# Altium PCB SolarPanel_v2.PcbDoc
Units mm, origin at the board's own origin, x right, y up, seen from the top; angles counter-clockwise.
Board outline 320.5 x 82 mm, 4 copper layers (Top Layer, Power 1, Power 2, Bottom Layer), stack 1.58 mm thick; 7 components, 5 nets, 38 pads, 120 vias.
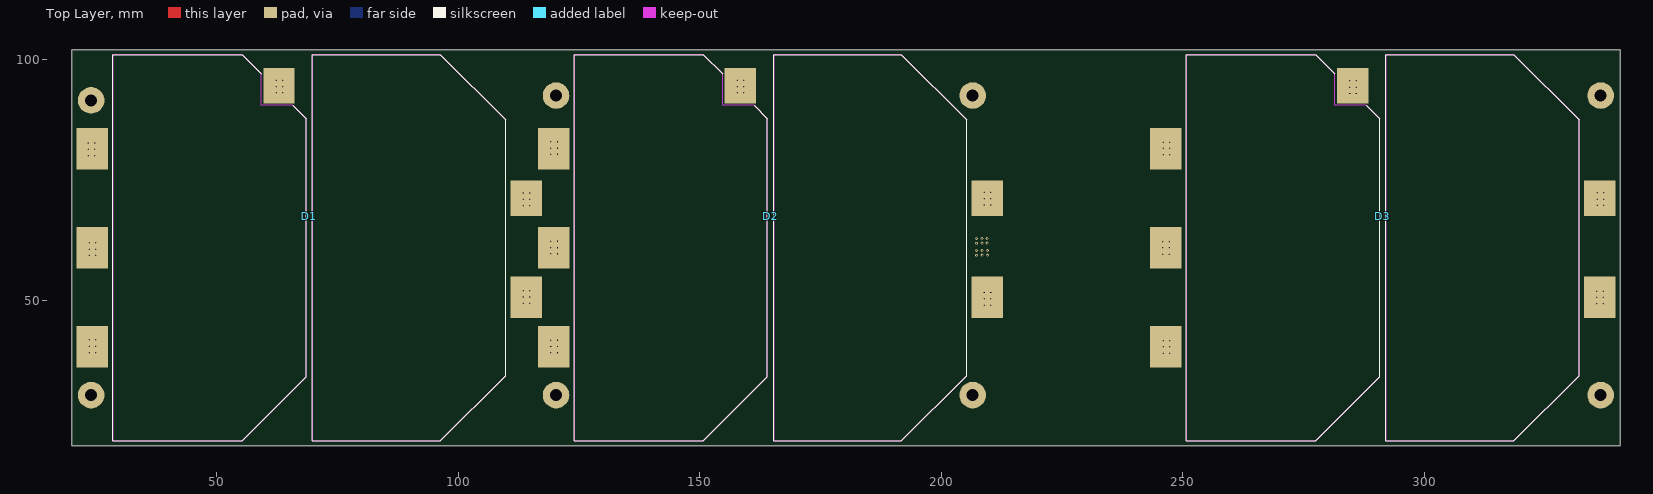
[diagram p0: Top Layer view]
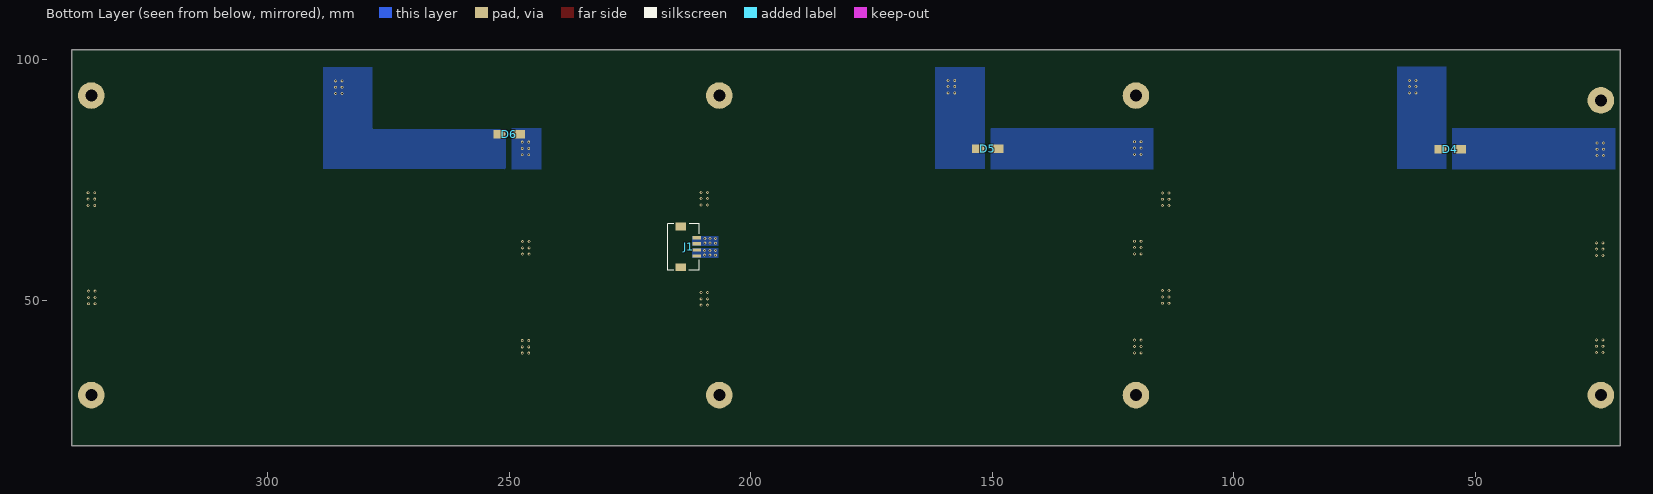
[diagram p1: Bottom Layer view, seen from below]
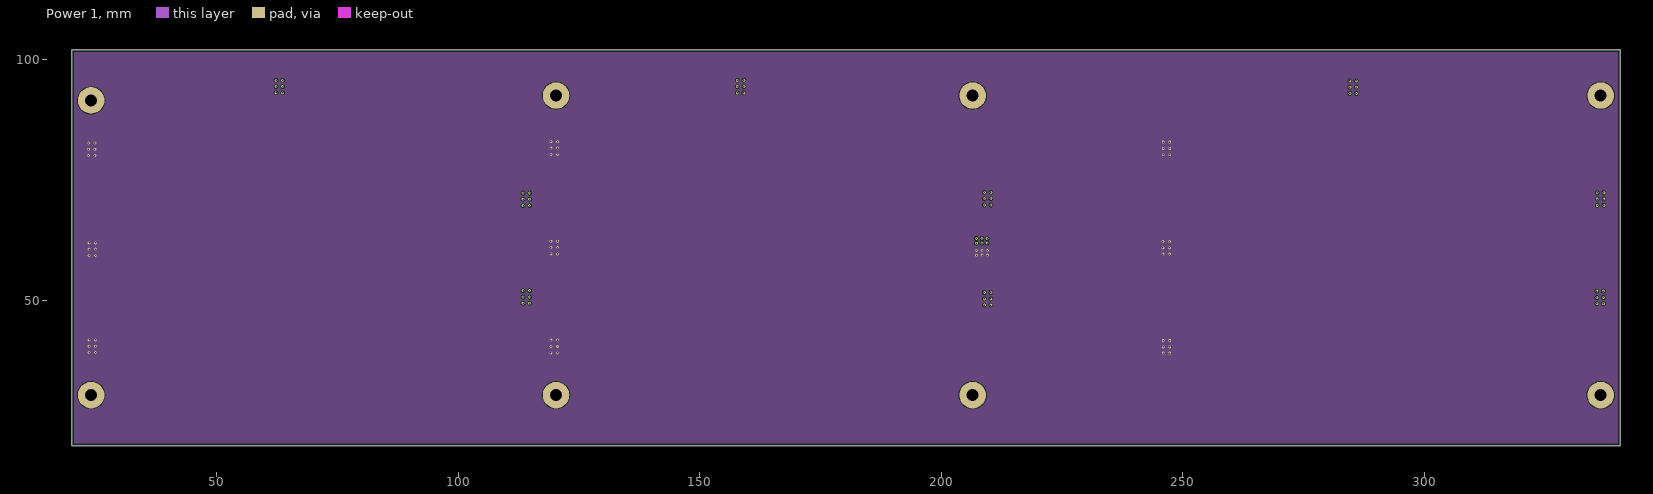
[diagram p2: Power 1]
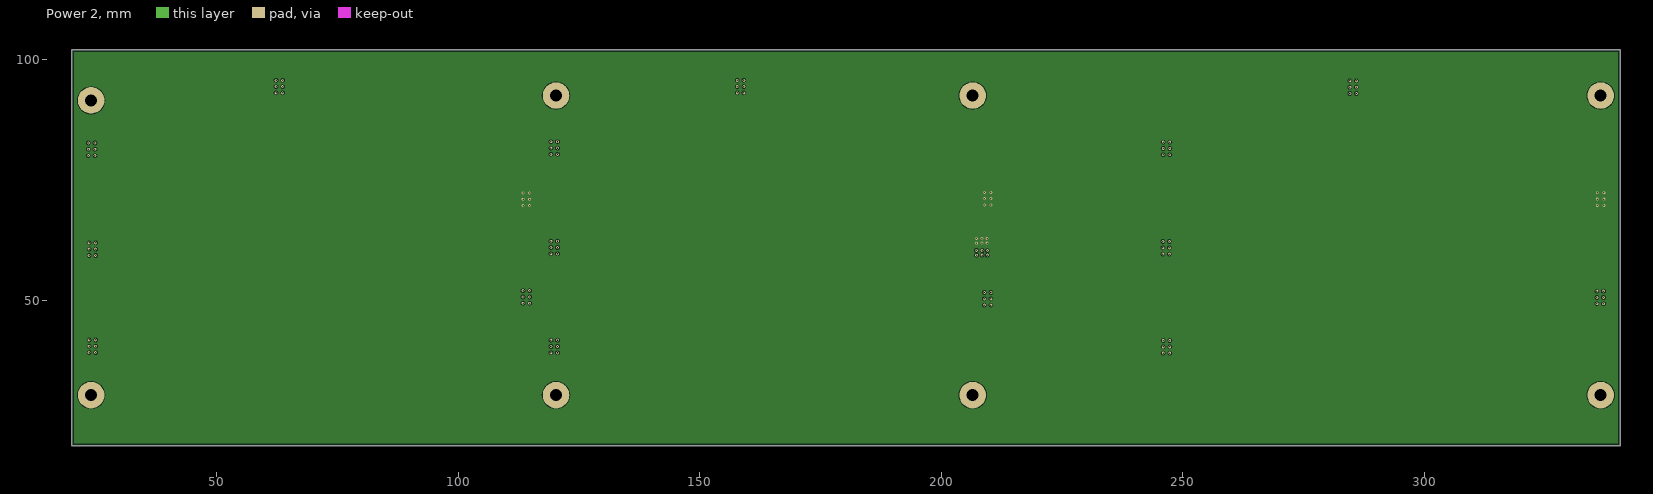
[diagram p3: Power 2]
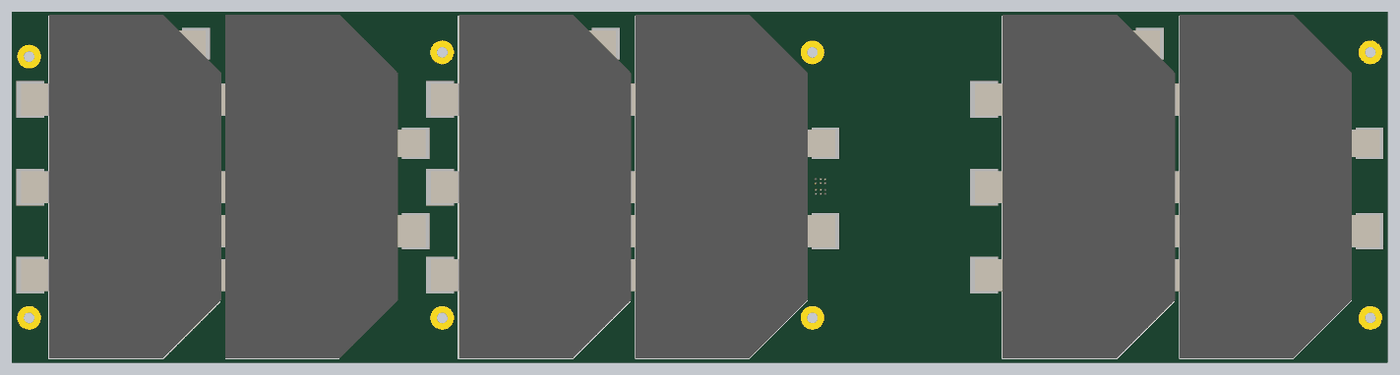
[diagram p4: 3D render of the assembled board from above, using the file's embedded part models]

## Layer stack, top to bottom
Top Solder: solder mask 0.0102, Solder Resist, Dk 3.5
Top Layer: signal copper 0.0356
Dielectric 1: core 0.254, FR-4, Dk 4.2
Power 1: signal copper 0.036
Dielectric 3: prepreg 0.929, Dk 4.2
Power 2: signal copper 0.036
Dielectric 2: core 0.254, Dk 4.2
Bottom Layer: signal copper 0.0356
Bottom Solder: solder mask 0.0102, Solder Resist, Dk 3.5

## Board outline
20,20 340.5,20 340.5,102 20,102

## Design rules (kind name [scope] priority, off if disabled: settings)
AssemblyTestPointUsage [All] p1 off:
AssemblyTestpoint [All] p1 off: testpointundercomponent=TRUE minsize=1.016 maxsize=2.54 preferedsize=1.524 minholesize=0 maxholesize=1.016 preferedholesize=0.813 testpointgrid=0.025 usegrid=TRUE gridtolerance=0 allowsidetop=TRUE allowsidebottom=TRUE
BoardOutlineClearance [All] p1: gap=0.5 ignorepadtopadclearanceinfootprint=FALSE
Clearance "Stitching GND" [IsStitchingVia and InNet('GND') vs (IsVia and (Not IsStitchingVia)) Or IsPad] p1: gap=0 ignorepadtopadclearanceinfootprint=TRUE
Clearance Component_Clearance [IsComponent vs IsComponent] p2: gap=0.254 ignorepadtopadclearanceinfootprint=FALSE
Clearance [All] p3: gap=0.152 ignorepadtopadclearanceinfootprint=TRUE
FabricationTestPointUsage [All] p1 off: valid=0 allowmultiple=FALSE
FabricationTestpoint [All] p1 off: side=3 testpointundercomponent=FALSE minsize=1.016 maxsize=2.54 preferedsize=1.524 minholesize=0 maxholesize=1.016 preferedholesize=0.813 testpointgrid=0.025 allowsidetop=TRUE allowsidebottom=TRUE usegrid=TRUE gridtolerance=0
HoleSize [All] p1: absolutevalues=TRUE maxlimit=6.3 minlimit=0.3 maxpercent=80.000 minpercent=20.000
HoleToHoleClearance [All] p1: gap=0.2 allowstackedmicrovias=FALSE
MinimumAnnularRing [All] p1: minimumring=0.15
MinimumSolderMaskSliver [All] p1: minsoldermaskwidth=0.1
PlaneClearance [All] p1: clearance=0.381
PlaneConnect [All] p1: planeconnectstyle=Direct reliefexpansion=0.508 reliefentries=4 reliefconductorwidth=0.254 reliefairgap=0.254
PolygonConnect [All] p1: connectstyle=Direct reliefconductorwidth=0.254 reliefentries=4 polygonreliefangle="90 Angle" airgapwidth=0.254
RoutingVias [All] p1: holewidth=0.3 width=0.6 viastyle="Through Hole" minholewidth=0.2 minwidth=0.6 maxholewidth=6.3 maxwidth=10 useviatemplates=TRUE viatemplateguid#1={FDB4C146-A24C-44AB-8A31-89D8144B0BD0} viatemplatename#1=v60h30m0mx0(Tol8-8)
SilkToSilkClearance [All] p1: silktosilkclearance=0
SilkToSolderMaskClearance [IsPad] p1: minsilkscreentomaskgap=0.2 clearancetoexposedcopper=TRUE
SolderMaskExpansion [All] p1: expansion=0.051
UnConnectedPin [All] p1:
UnRoutedNet [All] p1: checkbadconnections=TRUE
Width [All] p1: maxlimit=25.4 minlimit=0.152 preferedwidth=0.2
18 further rules are at their usual default settings.

## Components (designator, comment, footprint, x,y, rotation, side; value= is the part's Value field where it differs from the comment)
D1 "3G30A-2C" 3G30A_2C 25.25,61 r270 top locked
D2 "3G30A-2C" 3G30A_2C 120.75,61 r270 top locked
D3 "3G30A-2C" 3G30A_2C 247.5,61 r270 top locked
D4 "B340A-13-F" B340A-13-F 55.225,81.4 r0 bottom
D5 "B340A-13-F" B340A-13-F 150.9,81.5 r0 bottom
D6 "B340A-13-F" B340A-13-F 250,84.5 r0 bottom
J1 "DF13A-4P-1.25H(51)" DF13A-4P-1.25H(51) 213.102,59.914 r90 bottom

## Footprints (in the part's own frame and the unit in brackets; to place one, negate y for a bottom-side part, rotate by r counter-clockwise, add the part's x,y. Pads: shape width x height; smd on the part's side, far side on the other; paste and mask are expansions set on the pad)
3G30A_2C [mm]
  rect 7.35x6.5 smd: 1(-10.25,88.8) 4(-33.52,37.65)
  rect 8.53x6.5 smd: 2(-20.5,-1) 2(0,-1) 2(20.5,-1) 3(10.25,88.8)
  Top Layer keep-out region: -40,30 -40,3.25 40,3.25 40,30 26.75,43.25 -26.75,43.25 -29.5,40.5 -29.5,34 -36,34
  Top Layer keep-out region: -26.45,84.55 -40,71 -40,44.55 40,44.55 40,71 26.45,84.55
  silkscreen extent -40,3.25 40,84.55, body extent -40.25,-3.15 39.9,91.15, height 0.52
B340A-13-F [mm]
  rect 2.5x1.7 smd: 1(-2,0) 2(2,0)
  body extent -2.3,-1.5 2.3,1.5, height 2.4
DF13A-4P-1.25H(51) [mm] "4 pos, 1.25mm pitch DF13 connector (H125779CT-ND)"
  rect 0.7x1.8 smd: 1(-0.625,-1.956) 2(0.625,-1.956) 3(1.875,-1.956) 4(3.125,-1.956)
  rect 1.6x2.2 smd: ""(-2.975,1.344) ""(5.475,1.344)
  silkscreen extent -3.61,-2.46 6.06,4.04, body extent -3.61,-2.46 6.04,4.75, height 3.58

## Part data
D1 D2 D3: "Solar cell x2"
D4 D5 D6: "Schottky diode", Supplier Part Number 1=B340A-FDICT-ND, Supplier 1=Digi-Key
J1: "4 pos DF13 right angle surface mount connector", Supplier Part Number 1=H125779CT-ND, Supplier 1=Digi-Key

## Free pads (board coordinates)
  round 5.5 hole 2.5 unplated: ""(24,30.5) ""(24,91.5) ""(120.25,30.5) ""(120.25,92.5) ""(206.5,30.5) ""(206.5,92.5) ""(336.5,30.5) ""(336.5,92.5)

## Via types
v1: diameter 0.6, hole 0.3, Top Layer to Bottom Layer, tented both sides, 120 vias

## Nets (pads, with @x,y where several pads share a name; then routed paths per layer and width w, separated by ;. In a path a pad name is that pad's centre, name@x,y a point inside that pad or via, vN(x,y) a via of type N, cw(c..) or ccw(c..) an arc to the next point about the centre after c; other vN are vias at no path point)
GND: D1.2 D2.2 D3.2 D4.1 D5.1 D6.1 J1.1 J1.2
  other v1: 245.942,39.175 247.3,39.175 119.2,39.25 120.558,39.25 23.592,39.3 24.95,39.3 245.942,40.481 247.3,40.481 119.2,40.556 120.558,40.556 23.592,40.606 24.95,40.606 245.942,41.786 247.3,41.786 119.2,41.861 120.558,41.861 23.592,41.911 24.95,41.911 23.592,59.4 24.95,59.4 207.302,59.439 208.452,59.464 209.527,59.464 245.867,59.675 247.225,59.675 119.2,59.739 120.558,59.739 209.527,60.389 207.277,60.439 208.452,60.414 23.592,60.706 24.95,60.706 245.867,60.981 247.225,60.981 119.2,61.044 120.558,61.044 23.592,62.011 24.95,62.011 245.867,62.286 247.225,62.286 119.2,62.35 120.558,62.35 23.442,80.075 24.8,80.075 245.942,80.25 247.3,80.25 119.2,80.325 120.558,80.325 23.442,81.381 24.8,81.381 245.942,81.556 247.3,81.556 119.2,81.631 120.558,81.631 23.442,82.686 24.8,82.686 245.942,82.861 247.3,82.861 119.2,82.936 120.558,82.936
NetD1_4: D1.4 D4.2
  other v1: 62.292,93.05 63.65,93.05 62.292,94.356 63.65,94.356 62.292,95.661 63.65,95.661
NetD2_4: D2.4 D5.2
  other v1: 157.767,93.05 159.125,93.05 157.767,94.356 159.125,94.356 157.767,95.661 159.125,95.661
NetD3_4: D3.4 D6.2
  other v1: 284.567,92.925 285.925,92.925 284.567,94.231 285.925,94.231 284.567,95.536 285.925,95.536
VCC_SOLAR: D1.1 D2.1 D3.1 J1.3 J1.4
  other v1: 207.277,61.925 208.427,61.95 209.502,61.95 209.502,62.875 208.427,62.9 207.252,62.925 113.417,69.725 114.775,69.725 335.792,69.775 337.15,69.775 208.917,69.85 210.275,69.85 113.417,71.031 114.775,71.031 335.792,71.081 337.15,71.081 208.917,71.156 210.275,71.156 113.417,72.336 114.775,72.336 335.792,72.386 337.15,72.386 208.917,72.461 210.275,72.461
pads on no net: D1.3 D2.3 D3.3 J1.
copper on no net:
  other v1: 208.917,49.125 210.275,49.125 335.717,49.4 337.075,49.4 113.417,49.5 114.775,49.5 208.917,50.431 210.275,50.431 335.717,50.706 337.075,50.706 113.417,50.806 114.775,50.806 208.917,51.736 210.275,51.736 335.717,52.011 337.075,52.011 113.417,52.111 114.775,52.111

## Polygon pours and split planes (outlines as drawn)
GND on Power 1 "GND_L02_P000" (solid, pour order 0): 20,102 20,20 340.5,20 340.5,102
VCC_SOLAR on Power 2 "VCC_SOLAR_L03_P004" (solid, pour order 4): 20.011,102.009 20.011,20.009 340.511,20.009 340.511,102.009
GND on Bottom Layer "GND_L04_P032" (solid, pour order 32): 212.102,60.914 212.102,58.939 206.752,58.939 206.752,60.914
VCC_SOLAR on Bottom Layer "VCC_SOLAR_L04_P030" (solid, pour order 30): 212.077,63.4 212.077,61.425 206.727,61.425 206.727,63.4
NetD3_4 on Bottom Layer "NETD3_4_L04_P028" (solid, pour order 28): 278.3,85.725 278.075,85.5 250.75,85.5 250.75,77.485 251,77.235 251.09,77.325 288.475,77.325 288.475,98.375 278.3,98.375
GND on Bottom Layer "GND_L04_P026" (solid, pour order 26): 243.35,85.725 243.35,77.2 243.375,77.225 249.5,77.225 249.5,85.725
NetD2_4 on Bottom Layer "NETD2_4_L04_P024" (solid, pour order 24): 151.6,77.35 161.775,77.35 161.775,98.4 151.6,98.4
GND on Bottom Layer "GND_L04_P022" (solid, pour order 22): 116.65,85.75 116.65,77.225 116.675,77.25 150.325,77.25 150.325,85.7 150.25,85.775 150.225,85.75
GND on Bottom Layer "GND_L04_P020" (solid, pour order 20): 21.05,85.775 21.05,77.25 21.075,77.275 54.725,77.275 54.725,85.725 54.65,85.8 54.625,85.775
NetD1_4 on Bottom Layer "NETD1_4_L04_P018" (solid, pour order 18): 56,77.375 66.175,77.375 66.175,98.425 56,98.425